# Altium PCB AICat V1.7 双面板 板厚1.6mm_lrd.PcbDoc (part 5 of 6)
Units mm, origin at the board's own origin, x right, y up, seen from the top; angles counter-clockwise.
Board outline 63.83 x 43.59 mm, 2 copper layers (Top Layer, Bottom Layer); 123 components, 84 nets, 332 pads, 255 vias.
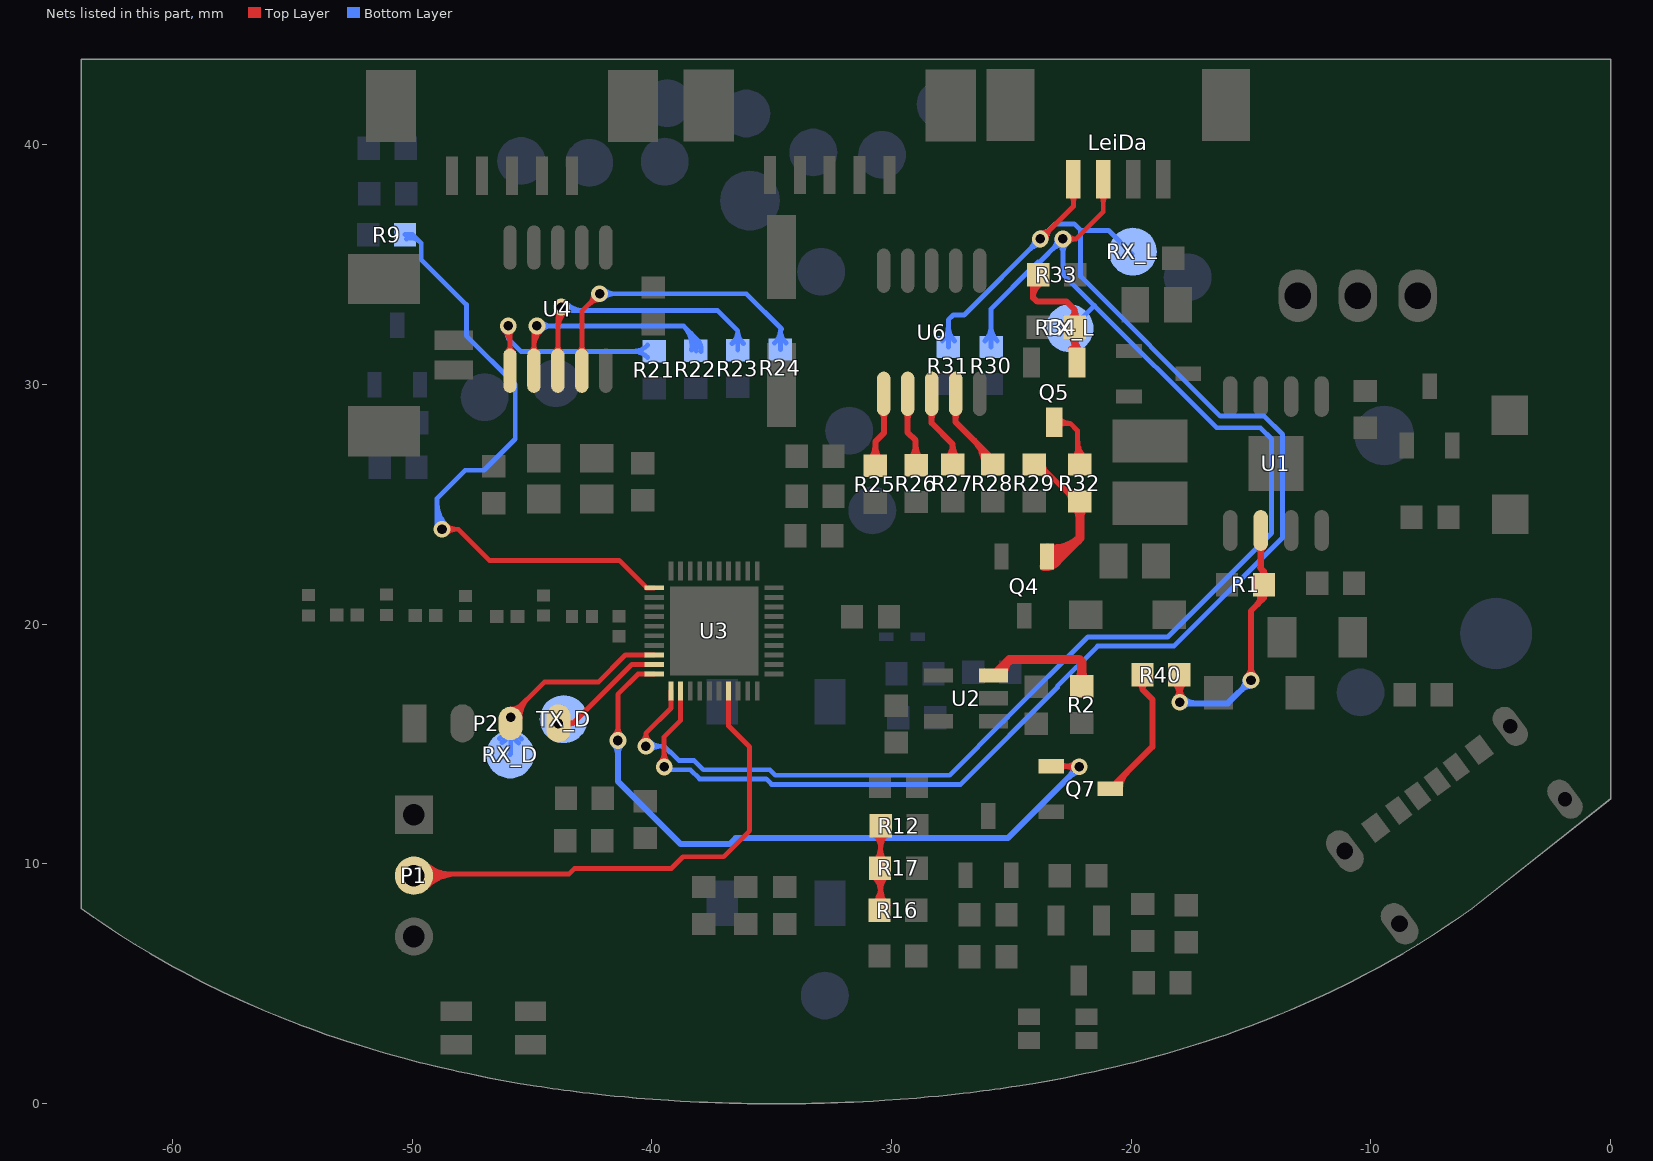
[diagram p5: the nets of this part, all layers, seen from the top]

## Via types
v1: diameter 0.7, hole 0.4, Top Layer to Bottom Layer, tented both sides, 255 vias

## Nets (pads, with @x,y where several pads share a name; then routed paths per layer and width w, separated by ;. In a path a pad name is that pad's centre, name@x,y a point inside that pad or via, vN(x,y) a via of type N, cw(c..) or ccw(c..) an arc to the next point about the centre after c; other vN are vias at no path point) (continued)
NetQ4_1: Q4.1 R29.2 R32.1 | length 46.1
  Top Layer w0.203: R29.2@-24.199,26.684 -23.859,26.684 R32.1@-22.294,25.118 ; R29.2@-24.022,26.295 cw(c-24.022,24.965) -23.081,25.905 ; R29.2@-24.022,26.295 cw(c-24.022,24.965) -23.081,25.905 ; R29.2@-24.022,26.295 cw(c-24.022,24.965) -23.081,25.905 ; R29.2@-24.022,26.295 cw(c-24.022,24.965) -23.081,25.905 ; R29.2@-24.022,26.295 cw(c-24.022,24.965) -23.081,25.905 ; R29.2@-24.022,26.498 cw(c-24.022,25.658) -23.428,26.252 ; R29.2@-24.022,26.498 cw(c-24.022,25.658) -23.428,26.252 ; R29.2@-24.022,26.498 cw(c-24.022,25.658) -23.428,26.252 ; R29.2@-24.022,26.498 cw(c-24.022,25.658) -23.428,26.252 ; R29.2@-24.022,26.498 cw(c-24.022,25.658) -23.428,26.252 ; R29.2@-23.658,26.658 ccw(c-23.234,26.658) -23.534,26.358 ; R29.2@-23.658,26.658 ccw(c-23.234,26.658) -23.534,26.358 ; R29.2@-23.658,26.658 ccw(c-23.234,26.658) -23.534,26.358 ; R29.2@-23.658,26.658 ccw(c-23.234,26.658) -23.534,26.358 ; R29.2@-23.658,26.658 ccw(c-23.234,26.658) -23.534,26.358 ; -23.004,25.829 ccw(c-22.167,26.666) R32.1@-22.167,25.482 ; -23.004,25.829 ccw(c-22.167,26.666) R32.1@-22.167,25.482 ; -23.004,25.829 ccw(c-22.167,26.666) R32.1@-22.167,25.482 ; -23.004,25.829 ccw(c-22.167,26.666) R32.1@-22.167,25.482 ; -23.004,25.829 ccw(c-22.167,26.666) R32.1@-22.167,25.482 ; -22.697,25.521 cw(c-23.1,25.118) R32.1@-22.53,25.118 ; -22.697,25.521 cw(c-23.1,25.118) R32.1@-22.53,25.118 ; -22.697,25.521 cw(c-23.1,25.118) R32.1@-22.53,25.118 ; -22.697,25.521 cw(c-23.1,25.118) R32.1@-22.53,25.118 ; -22.697,25.521 cw(c-23.1,25.118) R32.1@-22.53,25.118 ; -22.658,25.482 ccw(c-22.167,25.973) R32.1@-22.167,25.278 ; -22.658,25.482 ccw(c-22.167,25.973) R32.1@-22.167,25.278 ; -22.658,25.482 ccw(c-22.167,25.973) R32.1@-22.167,25.278 ; -22.658,25.482 ccw(c-22.167,25.973) R32.1@-22.167,25.278 ; -22.658,25.482 ccw(c-22.167,25.973) R32.1@-22.167,25.278
  Top Layer w0.381: Q4.1@-23.515,22.583 ccw(c-23.515,23.476) -22.884,22.844 ; Q4.1@-23.515,22.619 -23.109,22.619 -22.142,23.587 ; Q4.1@-23.515,22.964 ccw(c-23.515,24.777) -22.233,23.495 ; R32.1@-22.142,25.118 -22.142,23.587 ; Q4.1@-23.633,22.416 ccw(c-23.538,22.932) -23.167,22.561 ; Q4.1@-23.633,22.416 ccw(c-23.538,22.932) -23.167,22.561 ; Q4.1@-23.633,22.416 ccw(c-23.538,22.932) -23.167,22.561 ; Q4.1@-23.633,22.416 ccw(c-23.538,22.932) -23.167,22.561 ; Q4.1@-23.564,22.791 ccw(c-23.379,23.798) -22.654,23.074 ; Q4.1@-23.564,22.791 ccw(c-23.379,23.798) -22.654,23.074 ; Q4.1@-23.564,22.791 ccw(c-23.379,23.798) -22.654,23.074 ; Q4.1@-23.564,22.791 ccw(c-23.379,23.798) -22.654,23.074 ; Q4.1@-23.495,23.165 ccw(c-23.219,24.664) -22.142,23.587 ; Q4.1@-23.495,23.165 ccw(c-23.219,24.664) -22.142,23.587 ; Q4.1@-23.495,23.165 ccw(c-23.219,24.664) -22.142,23.587 ; Q4.1@-23.495,23.165 ccw(c-23.219,24.664) -22.142,23.587 ; Q4.1@-23.438,22.51 cw(c-23.174,22.246) -23.174,22.619 ; Q4.1@-23.438,22.51 cw(c-23.174,22.246) -23.174,22.619 ; Q4.1@-23.438,22.51 cw(c-23.174,22.246) -23.174,22.619 ; Q4.1@-23.438,22.51 cw(c-23.174,22.246) -23.174,22.619 ; R32.1@-22.336,24.924 cw(c-22.804,24.455) -22.142,24.455 ; R32.1@-22.336,24.924 cw(c-22.804,24.455) -22.142,24.455 ; R32.1@-22.336,24.924 cw(c-22.804,24.455) -22.142,24.455 ; R32.1@-22.336,24.924 cw(c-22.804,24.455) -22.142,24.455 ; R32.1@-22.336,24.924 cw(c-22.804,24.455) -22.142,24.455 ; -22.142,24.455 cw(c-21.479,24.455) R32.1@-21.948,24.924 ; -22.142,24.455 cw(c-21.479,24.455) R32.1@-21.948,24.924 ; -22.142,24.455 cw(c-21.479,24.455) R32.1@-21.948,24.924 ; -22.142,24.455 cw(c-21.479,24.455) R32.1@-21.948,24.924 ; -22.142,24.455 cw(c-21.479,24.455) R32.1@-21.948,24.924
NetQ5_1: Q5.1 R33.1 R34.2 | length 25.1
  Top Layer w0.203: R33.1@-24.232,34.575 R33.1@-24.232,34.778 ; Q5.1@-22.54,31.509 Q5.1@-22.309,31.278
  Top Layer w0.254: R33.1@-24.105,34.575 -24.105,33.643 -23.92,33.457 -22.7,33.457 -22.362,33.119 ; Q5.1@-22.362,30.923 -22.362,33.119 ; -24.105,33.734 cw(c-23.289,33.734) R33.1@-23.866,34.311 ; -24.105,33.734 cw(c-23.289,33.734) R33.1@-23.866,34.311 ; -24.105,33.734 cw(c-23.289,33.734) R33.1@-23.866,34.311 ; R34.2@-22.601,32.127 cw(c-23.178,31.55) -22.362,31.55 ; R34.2@-22.601,32.127 cw(c-23.178,31.55) -22.362,31.55 ; R34.2@-22.601,32.127 cw(c-23.178,31.55) -22.362,31.55 ; R34.2@-22.601,32.127 cw(c-23.178,31.55) -22.362,31.55 ; R34.2@-22.601,32.127 cw(c-23.178,31.55) -22.362,31.55 ; R34.2@-22.573,32.679 ccw(c-22.925,33.119) -22.362,33.119 ; R34.2@-22.573,32.679 ccw(c-22.925,33.119) -22.362,33.119 ; R34.2@-22.573,32.679 ccw(c-22.925,33.119) -22.362,33.119 ; R34.2@-22.573,32.679 ccw(c-22.925,33.119) -22.362,33.119 ; R34.2@-22.573,32.679 ccw(c-22.925,33.119) -22.362,33.119 ; -22.362,31.55 cw(c-21.546,31.55) R34.2@-22.123,32.127 ; -22.362,31.55 cw(c-21.546,31.55) R34.2@-22.123,32.127 ; -22.362,31.55 cw(c-21.546,31.55) R34.2@-22.123,32.127 ; -22.362,31.55 cw(c-21.546,31.55) R34.2@-22.123,32.127 ; -22.362,31.55 cw(c-21.546,31.55) R34.2@-22.123,32.127 ; R34.2@-22.362,31.987 ccw(c-21.47,31.987) Q5.1@-22.101,31.355 ; R34.2@-22.362,31.987 ccw(c-21.47,31.987) Q5.1@-22.101,31.355 ; R34.2@-22.362,31.987 ccw(c-21.47,31.987) Q5.1@-22.101,31.355 ; R34.2@-22.362,31.987 ccw(c-21.47,31.987) Q5.1@-22.101,31.355 ; R34.2@-22.362,31.987 ccw(c-21.47,31.987) Q5.1@-22.101,31.355 ; -22.362,33.119 ccw(c-21.799,33.119) R34.2@-22.151,32.679 ; -22.362,33.119 ccw(c-21.799,33.119) R34.2@-22.151,32.679 ; -22.362,33.119 ccw(c-21.799,33.119) R34.2@-22.151,32.679 ; -22.362,33.119 ccw(c-21.799,33.119) R34.2@-22.151,32.679 ; -22.362,33.119 ccw(c-21.799,33.119) R34.2@-22.151,32.679 ; -24.105,33.615 cw(c-23.388,33.615) -23.72,34.25 ccw(c-23.388,33.615) -24.105,33.615 ; -24.105,34.034 cw(c-23.607,34.034) -23.838,34.476 ccw(c-23.607,34.034) -24.105,34.034
NetQ5_3: Q5.3 R32.2 | length 15.7
  Top Layer w0.203: Q5.3@-23.437,28.377 -22.548,28.377 ; R32.2@-22.294,26.658 -22.243,26.709 -22.243,28.073 -22.548,28.377 ; Q5.3@-23.033,28.247 cw(c-22.718,27.933) -22.718,28.377 ; Q5.3@-23.033,28.247 cw(c-22.718,27.933) -22.718,28.377 ; Q5.3@-23.033,28.247 cw(c-22.718,27.933) -22.718,28.377 ; Q5.3@-23.033,28.247 cw(c-22.718,27.933) -22.718,28.377 ; Q5.3@-23.024,28.589 ccw(c-22.548,29.018) -22.548,28.377 ; Q5.3@-23.024,28.589 ccw(c-22.548,29.018) -22.548,28.377 ; Q5.3@-23.024,28.589 ccw(c-22.548,29.018) -22.548,28.377 ; Q5.3@-23.024,28.589 ccw(c-22.548,29.018) -22.548,28.377 ; R32.2@-22.424,26.915 ccw(c-22.859,27.351) -22.243,27.351 ; R32.2@-22.424,26.915 ccw(c-22.859,27.351) -22.243,27.351 ; R32.2@-22.424,26.915 ccw(c-22.859,27.351) -22.243,27.351 ; R32.2@-22.424,26.915 ccw(c-22.859,27.351) -22.243,27.351 ; R32.2@-22.424,26.915 ccw(c-22.859,27.351) -22.243,27.351 ; -22.243,27.23 ccw(c-21.595,27.23) R32.2@-22.053,26.771 ; -22.243,27.23 ccw(c-21.595,27.23) R32.2@-22.053,26.771 ; -22.243,27.23 ccw(c-21.595,27.23) R32.2@-22.053,26.771 ; -22.243,27.23 ccw(c-21.595,27.23) R32.2@-22.053,26.771 ; -22.243,27.23 ccw(c-21.595,27.23) R32.2@-22.053,26.771 ; -22.243,27.72 ccw(c-21.104,27.72) R32.2@-21.91,26.915 ; -22.243,27.72 ccw(c-21.104,27.72) R32.2@-21.91,26.915 ; -22.243,27.72 ccw(c-21.104,27.72) R32.2@-21.91,26.915 ; -22.243,27.72 ccw(c-21.104,27.72) R32.2@-21.91,26.915 ; -22.243,27.72 ccw(c-21.104,27.72) R32.2@-21.91,26.915
NetQ7_3: Q7.3 R40.1 | length 12.2
  Top Layer w0.254: Q7.3@-20.873,13.125 -19.119,14.879 -19.119,16.863 -19.533,17.278 ; R40.1@-19.533,17.887 -19.533,17.278 ; Q7.3@-20.465,13.125 cw(c-19.48,13.125) -20.177,13.822 ; Q7.3@-20.465,13.125 cw(c-19.48,13.125) -20.177,13.822 ; Q7.3@-20.465,13.125 cw(c-19.48,13.125) -20.177,13.822 ; R40.1@-19.702,17.569 cw(c-19.87,17.278) -19.533,17.278 ; R40.1@-19.702,17.569 cw(c-19.87,17.278) -19.533,17.278 ; R40.1@-19.702,17.569 cw(c-19.87,17.278) -19.533,17.278 ; R40.1@-19.702,17.569 cw(c-19.87,17.278) -19.533,17.278 ; R40.1@-19.702,17.569 cw(c-19.87,17.278) -19.533,17.278 ; R40.1@-19.702,17.569 cw(c-19.87,17.278) -19.533,17.278 ; -19.533,17.278 cw(c-19.197,17.278) R40.1@-19.365,17.569 ; -19.533,17.278 cw(c-19.197,17.278) R40.1@-19.365,17.569 ; -19.533,17.278 cw(c-19.197,17.278) R40.1@-19.365,17.569 ; -19.533,17.278 cw(c-19.197,17.278) R40.1@-19.365,17.569 ; -19.533,17.278 cw(c-19.197,17.278) R40.1@-19.365,17.569 ; -19.533,17.278 cw(c-19.197,17.278) R40.1@-19.365,17.569
NetR1_2: R1.2 R40.2 U1.2 | length 41.6
  Top Layer w0.254: R40.2@-18.263,17.616 -17.976,17.328 ; v1(-17.976,16.744) -17.976,17.328 ; v1(-15.004,17.659) -15.004,20.554 -14.463,21.096 ; U1.2@-14.598,24.491 U1.2@-14.598,23.907 -14.598,22.332 -14.471,22.205 ; R1.2@-14.463,21.646 -14.463,21.096 ; R40.2@-18.232,17.623 cw(c-18.851,17.004) v1@-17.976,17.004 ; R40.2@-18.232,17.623 cw(c-18.851,17.004) v1@-17.976,17.004 ; R40.2@-18.232,17.623 cw(c-18.851,17.004) v1@-17.976,17.004 ; v1@-18.134,16.902 ccw(c-18.514,17.283) -17.976,17.283 ; v1@-18.134,16.902 ccw(c-18.514,17.283) -17.976,17.283 ; v1@-18.134,16.902 ccw(c-18.514,17.283) -17.976,17.283 ; R40.2@-18.124,17.55 cw(c-18.217,17.328) -17.976,17.328 ; R40.2@-18.124,17.55 cw(c-18.217,17.328) -17.976,17.328 ; R40.2@-18.124,17.55 cw(c-18.217,17.328) -17.976,17.328 ; v1@-17.976,17.088 cw(c-17.219,17.088) R40.2@-17.754,17.623 ; v1@-17.976,17.088 cw(c-17.219,17.088) R40.2@-17.754,17.623 ; v1@-17.976,17.088 cw(c-17.219,17.088) R40.2@-17.754,17.623 ; -17.976,17.283 ccw(c-17.438,17.283) v1@-17.818,16.902 ; -17.976,17.283 ccw(c-17.438,17.283) v1@-17.818,16.902 ; -17.976,17.283 ccw(c-17.438,17.283) v1@-17.818,16.902 ; -17.976,17.328 cw(c-17.709,17.328) R40.2@-17.834,17.564 ; -17.976,17.328 cw(c-17.709,17.328) R40.2@-17.834,17.564 ; -17.976,17.328 cw(c-17.709,17.328) R40.2@-17.834,17.564 ; v1@-15.162,17.816 ccw(c-15.543,18.197) -15.004,18.197 ; v1@-15.162,17.816 ccw(c-15.543,18.197) -15.004,18.197 ; v1@-15.162,17.816 ccw(c-15.543,18.197) -15.004,18.197 ; -15.004,18.197 ccw(c-14.466,18.197) v1@-14.847,17.816 ; -15.004,18.197 ccw(c-14.466,18.197) v1@-14.847,17.816 ; -15.004,18.197 ccw(c-14.466,18.197) v1@-14.847,17.816 ; -14.741,20.817 ccw(c-15.045,21.121) R1.2@-14.719,21.401 ; -14.741,20.817 ccw(c-15.045,21.121) R1.2@-14.719,21.401 ; -14.741,20.817 ccw(c-15.045,21.121) R1.2@-14.719,21.401 ; U1.2@-14.724,23.236 cw(c-15.027,22.933) -14.598,22.933 ; U1.2@-14.724,23.236 cw(c-15.027,22.933) -14.598,22.933 ; U1.2@-14.724,23.236 cw(c-15.027,22.933) -14.598,22.933 ; U1.2@-14.724,23.236 cw(c-15.027,22.933) -14.598,22.933 ; U1.2@-14.724,23.236 cw(c-15.027,22.933) -14.598,22.933 ; -14.624,22.359 cw(c-15.005,21.978) R1.2@-14.536,21.713 ; -14.624,22.359 cw(c-15.005,21.978) R1.2@-14.536,21.713 ; -14.624,22.359 cw(c-15.005,21.978) R1.2@-14.536,21.713 ; -14.624,22.359 cw(c-15.005,21.978) R1.2@-14.536,21.713 ; -14.624,22.359 cw(c-15.005,21.978) R1.2@-14.536,21.713 ; R1.2@-14.603,21.314 cw(c-14.703,21.096) -14.463,21.096 ; R1.2@-14.603,21.314 cw(c-14.703,21.096) -14.463,21.096 ; R1.2@-14.603,21.314 cw(c-14.703,21.096) -14.463,21.096 ; -14.598,22.933 cw(c-14.169,22.933) U1.2@-14.472,23.236 ; -14.598,22.933 cw(c-14.169,22.933) U1.2@-14.472,23.236 ; -14.598,22.933 cw(c-14.169,22.933) U1.2@-14.472,23.236 ; -14.598,22.933 cw(c-14.169,22.933) U1.2@-14.472,23.236 ; -14.598,22.933 cw(c-14.169,22.933) U1.2@-14.472,23.236 ; -14.548,21.011 ccw(c-14.837,21.3) R1.2@-14.527,21.567 ; -14.548,21.011 ccw(c-14.837,21.3) R1.2@-14.527,21.567 ; -14.548,21.011 ccw(c-14.837,21.3) R1.2@-14.527,21.567 ; -14.543,22.277 cw(c-14.827,21.993) R1.2@-14.526,21.727 ; -14.543,22.277 cw(c-14.827,21.993) R1.2@-14.526,21.727 ; -14.543,22.277 cw(c-14.827,21.993) R1.2@-14.526,21.727 ; -14.543,22.277 cw(c-14.827,21.993) R1.2@-14.526,21.727 ; -14.543,22.277 cw(c-14.827,21.993) R1.2@-14.526,21.727 ; -14.463,21.096 cw(c-14.223,21.096) R1.2@-14.322,21.314 ; -14.463,21.096 cw(c-14.223,21.096) R1.2@-14.322,21.314 ; -14.463,21.096 cw(c-14.223,21.096) R1.2@-14.322,21.314
  Bottom Layer w0.254: v1@-17.671,16.693 -15.969,16.693 v1(-15.004,17.659) ; v1@-17.818,16.586 cw(c-17.56,16.328) -17.56,16.693 ; v1@-17.818,16.586 cw(c-17.56,16.328) -17.56,16.693 ; v1@-17.818,16.586 cw(c-17.56,16.328) -17.56,16.693 ; v1@-17.818,16.902 ccw(c-17.315,17.405) -17.315,16.693 ; v1@-17.818,16.902 ccw(c-17.315,17.405) -17.315,16.693 ; v1@-17.818,16.902 ccw(c-17.315,17.405) -17.315,16.693 ; -15.385,17.278 cw(c-15.004,16.897) v1@-15.004,17.436 ; -15.385,17.278 ccw(c-15.766,17.659) v1@-15.227,17.659 ; -15.385,17.278 ccw(c-15.766,17.659) v1@-15.227,17.659 ; -15.385,17.278 cw(c-15.004,16.897) v1@-15.004,17.436 ; -15.385,17.278 ccw(c-15.766,17.659) v1@-15.227,17.659 ; -15.385,17.278 cw(c-15.004,16.897) v1@-15.004,17.436
NetR2_2: R2.2 U2.3 | length 13.9
  Top Layer w0.381: U2.3@-25.744,17.855 -25.077,18.522 ; R2.2@-22.065,17.413 -22.065,18.421 -22.167,18.522 -25.077,18.522 ; U2.3@-25.335,17.86 cw(c-24.452,17.898) -25.077,18.522 ; U2.3@-25.335,17.86 cw(c-24.452,17.898) -25.077,18.522 ; U2.3@-25.335,17.86 cw(c-24.452,17.898) -25.077,18.522 ; U2.3@-25.335,17.86 cw(c-24.452,17.898) -25.077,18.522 ; U2.3@-25.335,17.86 cw(c-24.452,17.898) -25.077,18.522 ; R2.2@-22.26,17.607 ccw(c-22.728,18.075) -22.065,18.075 ; R2.2@-22.26,17.607 ccw(c-22.728,18.075) -22.065,18.075 ; R2.2@-22.26,17.607 ccw(c-22.728,18.075) -22.065,18.075 ; R2.2@-22.26,17.607 ccw(c-22.728,18.075) -22.065,18.075 ; R2.2@-22.26,17.607 ccw(c-22.728,18.075) -22.065,18.075 ; -22.065,18.075 ccw(c-21.403,18.075) R2.2@-21.871,17.607 ; -22.065,18.075 ccw(c-21.403,18.075) R2.2@-21.871,17.607 ; -22.065,18.075 ccw(c-21.403,18.075) R2.2@-21.871,17.607 ; -22.065,18.075 ccw(c-21.403,18.075) R2.2@-21.871,17.607 ; -22.065,18.075 ccw(c-21.403,18.075) R2.2@-21.871,17.607
NetR12_2: R12.2 R16.2 R17.1 | length 33.3
  Top Layer w0.203: R16.2@-30.662,8.263 ccw(c-31.159,8.761) -30.455,8.761 ; R12.2@-30.455,11.512 -30.455,8.032 R16.2@-30.405,7.981 ; R16.2@-30.291,8.119 cw(c-29.895,8.516) R16.2@-30.455,8.516 ; R16.2@-30.148,8.263 cw(c-29.405,9.006) -30.455,9.006 ; R17.1@-30.738,9.452 cw(c-31.419,8.77) -30.455,8.77 ; R17.1@-30.738,9.452 cw(c-31.419,8.77) -30.455,8.77 ; R17.1@-30.738,9.452 cw(c-31.419,8.77) -30.455,8.77 ; R17.1@-30.738,10.016 ccw(c-31.419,10.697) -30.455,10.697 ; R17.1@-30.738,10.016 ccw(c-31.419,10.697) -30.455,10.697 ; R17.1@-30.738,10.016 ccw(c-31.419,10.697) -30.455,10.697 ; R12.2@-30.712,11.23 cw(c-31.333,10.609) -30.455,10.609 ; R12.2@-30.712,11.23 cw(c-31.333,10.609) -30.455,10.609 ; R12.2@-30.712,11.23 cw(c-31.333,10.609) -30.455,10.609 ; R16.2@-30.455,8.516 cw(c-31.016,8.516) -30.62,8.119 ccw(c-31.016,8.516) R16.2@-30.455,8.516 ; -30.455,8.761 ccw(c-29.752,8.761) -30.249,8.263 cw(c-29.752,8.761) -30.455,8.761 ; -30.455,8.893 cw(c-29.665,8.893) R17.1@-30.224,9.452 ; -30.455,8.893 cw(c-29.665,8.893) R17.1@-30.224,9.452 ; -30.455,8.893 cw(c-29.665,8.893) R17.1@-30.224,9.452 ; -30.455,9.006 cw(c-31.506,9.006) -30.763,8.263 ccw(c-31.506,9.006) -30.455,9.006 ; -30.455,10.575 ccw(c-29.665,10.575) R17.1@-30.224,10.016 ; -30.455,10.575 ccw(c-29.665,10.575) R17.1@-30.224,10.016 ; -30.455,10.575 ccw(c-29.665,10.575) R17.1@-30.224,10.016 ; -30.455,10.609 cw(c-29.578,10.609) R12.2@-30.198,11.23 ; -30.455,10.609 cw(c-29.578,10.609) R12.2@-30.198,11.23 ; -30.455,10.609 cw(c-29.578,10.609) R12.2@-30.198,11.23 ; -30.455,10.66 ccw(c-31.333,10.66) -30.712,11.281 cw(c-31.333,10.66) -30.455,10.66 ; -30.455,10.66 cw(c-29.578,10.66) -30.198,11.281 ccw(c-29.578,10.66) -30.455,10.66 ; R16.2@-30.763,8.314 ccw(c-31.506,9.057) -30.455,9.057 cw(c-31.506,9.057) R16.2@-30.763,8.314 ; R17.1@-30.738,9.503 cw(c-31.419,8.821) -30.455,8.821 ccw(c-31.419,8.821) R17.1@-30.738,9.503 ; R17.1@-30.738,10.067 ccw(c-31.419,10.748) -30.455,10.748 cw(c-31.419,10.748) R17.1@-30.738,10.067 ; R16.2@-30.62,8.17 ccw(c-31.016,8.566) -30.455,8.566 cw(c-31.016,8.566) R16.2@-30.62,8.17 ; -30.455,8.812 ccw(c-29.752,8.812) -30.249,8.314 cw(c-29.752,8.812) -30.455,8.812 ; -30.455,8.943 cw(c-29.665,8.943) -30.224,9.503 ccw(c-29.665,8.943) -30.455,8.943 ; -30.455,10.626 ccw(c-29.665,10.626) -30.224,10.067 cw(c-29.665,10.626) -30.455,10.626
NetR21_1: R21.1 U4.1 | length 26.1
  Top Layer w0.203: v1(-45.992,32.441) -45.923,32.372 U4.1@-45.923,30.575 ; v1@-46.168,32.266 cw(c-46.758,31.675) -45.923,31.675 ; v1@-46.168,32.266 cw(c-46.758,31.675) -45.923,31.675 ; v1@-46.168,32.266 cw(c-46.758,31.675) -45.923,31.675 ; v1@-46.168,32.266 cw(c-46.758,31.675) -45.923,31.675 ; v1@-46.168,32.266 cw(c-46.758,31.675) -45.923,31.675 ; U4.1@-46.049,31.349 ccw(c-46.354,31.653) -45.923,31.653 ; U4.1@-46.049,31.349 ccw(c-46.354,31.653) -45.923,31.653 ; U4.1@-46.049,31.349 ccw(c-46.354,31.653) -45.923,31.653 ; U4.1@-46.049,31.349 ccw(c-46.354,31.653) -45.923,31.653 ; U4.1@-46.049,31.349 ccw(c-46.354,31.653) -45.923,31.653 ; -45.923,31.653 ccw(c-45.493,31.653) U4.1@-45.797,31.349 ; -45.923,31.653 ccw(c-45.493,31.653) U4.1@-45.797,31.349 ; -45.923,31.653 ccw(c-45.493,31.653) U4.1@-45.797,31.349 ; -45.923,31.653 ccw(c-45.493,31.653) U4.1@-45.797,31.349 ; -45.923,31.653 ccw(c-45.493,31.653) U4.1@-45.797,31.349 ; -45.923,32.008 cw(c-45.559,32.008) v1@-45.817,32.266 ; -45.923,32.008 cw(c-45.559,32.008) v1@-45.817,32.266 ; -45.923,32.008 cw(c-45.559,32.008) v1@-45.817,32.266 ; -45.923,32.008 cw(c-45.559,32.008) v1@-45.817,32.266 ; -45.923,32.008 cw(c-45.559,32.008) v1@-45.817,32.266
  Bottom Layer w0.203: v1(-45.992,32.441) -45.992,31.908 ; -41.166,31.383 -41.522,31.383 ; -40.48,31.324 -40.539,31.383 -41.522,31.383 ; v1@-46.152,32.251 cw(c-46.441,31.908) -45.992,31.908 ; v1@-46.152,32.251 cw(c-46.441,31.908) -45.992,31.908 ; v1@-46.152,32.251 cw(c-46.441,31.908) -45.992,31.908 ; v1@-46.152,32.251 cw(c-46.441,31.908) -45.992,31.908 ; v1@-46.152,32.251 cw(c-46.441,31.908) -45.992,31.908 ; -45.992,31.908 cw(c-45.544,31.908) v1@-45.832,32.251 ; -45.992,31.908 cw(c-45.544,31.908) v1@-45.832,32.251 ; -45.992,31.908 cw(c-45.544,31.908) v1@-45.832,32.251 ; -45.992,31.908 cw(c-45.544,31.908) v1@-45.832,32.251 ; -45.992,31.908 cw(c-45.544,31.908) v1@-45.832,32.251 ; -45.992,31.908 -45.467,31.383 -41.522,31.383 ; -40.799,31.383 cw(c-40.799,30.505) R21.1@-40.178,31.126 ; -40.799,31.383 ccw(c-40.799,32.26) R21.1@-40.178,31.64 ; -40.799,31.383 cw(c-40.799,30.505) R21.1@-40.178,31.126 ; -40.799,31.383 ccw(c-40.799,32.26) R21.1@-40.178,31.64 ; -40.799,31.383 ccw(c-40.799,32.26) R21.1@-40.178,31.64 ; -40.799,31.383 cw(c-40.799,30.505) R21.1@-40.178,31.126 ; -40.799,31.383 ccw(c-40.799,32.26) R21.1@-40.178,31.64 ; -40.799,31.383 cw(c-40.799,30.505) R21.1@-40.178,31.126
NetR22_1: R22.1 U4.2 | length 35.9
  Top Layer w0.203: U4.2@-44.923,30.575 -44.923,32.317 v1(-44.798,32.441) ; U4.2@-45.049,31.349 ccw(c-45.354,31.653) -44.923,31.653 ; U4.2@-45.049,31.349 ccw(c-45.354,31.653) -44.923,31.653 ; U4.2@-45.049,31.349 ccw(c-45.354,31.653) -44.923,31.653 ; U4.2@-45.049,31.349 ccw(c-45.354,31.653) -44.923,31.653 ; U4.2@-45.049,31.349 ccw(c-45.354,31.653) -44.923,31.653 ; -44.923,31.54 cw(c-43.897,31.54) v1@-44.623,32.266 ; -44.923,31.54 cw(c-43.897,31.54) v1@-44.623,32.266 ; -44.923,31.54 cw(c-43.897,31.54) v1@-44.623,32.266 ; -44.923,31.54 cw(c-43.897,31.54) v1@-44.623,32.266 ; -44.923,31.54 cw(c-43.897,31.54) v1@-44.623,32.266 ; -44.923,31.653 ccw(c-44.493,31.653) U4.2@-44.797,31.349 ; -44.923,31.653 ccw(c-44.493,31.653) U4.2@-44.797,31.349 ; -44.923,31.653 ccw(c-44.493,31.653) U4.2@-44.797,31.349 ; -44.923,31.653 ccw(c-44.493,31.653) U4.2@-44.797,31.349 ; -44.923,31.653 ccw(c-44.493,31.653) U4.2@-44.797,31.349 ; -44.923,32.031 cw(c-44.388,32.031) v1@-44.766,32.409 ; -44.923,32.031 cw(c-44.388,32.031) v1@-44.766,32.409 ; -44.923,32.031 cw(c-44.388,32.031) v1@-44.766,32.409 ; -44.923,32.031 cw(c-44.388,32.031) v1@-44.766,32.409 ; -44.923,32.031 cw(c-44.388,32.031) v1@-44.766,32.409
  Bottom Layer w0.203: v1(-44.798,32.441) -38.677,32.441 -38.673,32.438 ; -38.67,32.435 cw(c-39.478,31.627) R22.1@-38.352,31.435 ; -38.392,32.157 cw(c-39.003,31.546) R22.1@-38.152,31.401 ; R22.1@-38.169,31.408 -38.169,31.933 -38.673,32.438 ; -38.114,31.879 cw(c-38.528,31.465) R22.1@-37.951,31.367 ; v1@-44.623,32.266 cw(c-44.199,31.842) -44.199,32.441 ; v1@-44.623,32.266 cw(c-44.199,31.842) -44.199,32.441 ; v1@-44.623,32.266 cw(c-44.199,31.842) -44.199,32.441 ; v1@-44.623,32.266 cw(c-44.199,31.842) -44.199,32.441 ; v1@-44.623,32.266 cw(c-44.199,31.842) -44.199,32.441 ; v1@-44.623,32.617 ccw(c-44.199,33.041) -44.199,32.441 ; v1@-44.623,32.617 ccw(c-44.199,33.041) -44.199,32.441 ; v1@-44.623,32.617 ccw(c-44.199,33.041) -44.199,32.441 ; v1@-44.623,32.617 ccw(c-44.199,33.041) -44.199,32.441 ; v1@-44.623,32.617 ccw(c-44.199,33.041) -44.199,32.441 ; -38.673,32.438 cw(c-39.487,31.624) R22.1@-38.352,31.434 ; -38.673,32.438 cw(c-39.487,31.624) R22.1@-38.352,31.434 ; -38.673,32.438 cw(c-39.487,31.624) R22.1@-38.352,31.434 ; -38.673,32.438 cw(c-39.487,31.624) R22.1@-38.352,31.434 ; -38.394,32.159 cw(c-39.008,31.544) R22.1@-38.152,31.401 ; -38.394,32.159 cw(c-39.008,31.544) R22.1@-38.152,31.401 ; -38.394,32.159 cw(c-39.008,31.544) R22.1@-38.152,31.401 ; -38.394,32.159 cw(c-39.008,31.544) R22.1@-38.152,31.401 ; -38.115,31.88 cw(c-38.53,31.464) R22.1@-37.951,31.367 ; -38.115,31.88 cw(c-38.53,31.464) R22.1@-37.951,31.367 ; -38.115,31.88 cw(c-38.53,31.464) R22.1@-37.951,31.367 ; -38.115,31.88 cw(c-38.53,31.464) R22.1@-37.951,31.367
NetR23_1: R23.1 U4.3 | length 33.9
  Top Layer w0.203: U4.3@-43.923,30.575 -43.923,33.088 v1(-43.782,33.229) ; U4.3@-44.049,31.349 ccw(c-44.354,31.653) -43.923,31.653 ; U4.3@-44.049,31.349 ccw(c-44.354,31.653) -43.923,31.653 ; U4.3@-44.049,31.349 ccw(c-44.354,31.653) -43.923,31.653 ; U4.3@-44.049,31.349 ccw(c-44.354,31.653) -43.923,31.653 ; U4.3@-44.049,31.349 ccw(c-44.354,31.653) -43.923,31.653 ; -43.923,31.653 ccw(c-43.493,31.653) U4.3@-43.797,31.349 ; -43.923,31.653 ccw(c-43.493,31.653) U4.3@-43.797,31.349 ; -43.923,31.653 ccw(c-43.493,31.653) U4.3@-43.797,31.349 ; -43.923,31.653 ccw(c-43.493,31.653) U4.3@-43.797,31.349 ; -43.923,31.653 ccw(c-43.493,31.653) U4.3@-43.797,31.349 ; -43.923,32.289 cw(c-42.843,32.289) v1@-43.607,33.053 ; -43.923,32.289 cw(c-42.843,32.289) v1@-43.607,33.053 ; -43.923,32.289 cw(c-42.843,32.289) v1@-43.607,33.053 ; -43.923,32.289 cw(c-42.843,32.289) v1@-43.607,33.053 ; -43.923,32.289 cw(c-42.843,32.289) v1@-43.607,33.053 ; -43.923,32.78 cw(c-43.333,32.78) v1@-43.75,33.197 ; -43.923,32.78 cw(c-43.333,32.78) v1@-43.75,33.197 ; -43.923,32.78 cw(c-43.333,32.78) v1@-43.75,33.197 ; -43.923,32.78 cw(c-43.333,32.78) v1@-43.75,33.197 ; -43.923,32.78 cw(c-43.333,32.78) v1@-43.75,33.197
  Bottom Layer w0.203: v1@-43.737,33.082 -38.53,33.082 -37.26,33.082 -36.416,32.238 ; R23.1@-36.416,31.433 -36.416,32.238 ; v1@-43.75,33.261 ccw(c-43.319,33.692) -43.319,33.082 ; v1@-43.75,33.261 ccw(c-43.319,33.692) -43.319,33.082 ; v1@-43.75,33.261 ccw(c-43.319,33.692) -43.319,33.082 ; v1@-43.75,33.261 ccw(c-43.319,33.692) -43.319,33.082 ; v1@-43.75,33.261 ccw(c-43.319,33.692) -43.319,33.082 ; v1@-43.607,33.404 ccw(c-42.828,34.183) -42.828,33.082 ; v1@-43.607,33.404 ccw(c-42.828,34.183) -42.828,33.082 ; v1@-43.607,33.404 ccw(c-42.828,34.183) -42.828,33.082 ; v1@-43.607,33.404 ccw(c-42.828,34.183) -42.828,33.082 ; v1@-43.607,33.404 ccw(c-42.828,34.183) -42.828,33.082 ; R23.1@-36.657,31.706 ccw(c-37.126,32.238) -36.416,32.238 ; R23.1@-36.657,31.706 ccw(c-37.126,32.238) -36.416,32.238 ; R23.1@-36.657,31.706 ccw(c-37.126,32.238) -36.416,32.238 ; R23.1@-36.657,31.706 ccw(c-37.126,32.238) -36.416,32.238 ; R23.1@-36.657,31.706 ccw(c-37.126,32.238) -36.416,32.238 ; -36.416,32.238 ccw(c-35.707,32.238) R23.1@-36.176,31.706 ; -36.416,32.238 ccw(c-35.707,32.238) R23.1@-36.176,31.706 ; -36.416,32.238 ccw(c-35.707,32.238) R23.1@-36.176,31.706 ; -36.416,32.238 ccw(c-35.707,32.238) R23.1@-36.176,31.706 ; -36.416,32.238 ccw(c-35.707,32.238) R23.1@-36.176,31.706
NetR24_1: R24.1 U4.4 | length 31.4
  Top Layer w0.203: U4.4@-42.923,30.575 -42.923,33.047 v1(-42.182,33.788) ; U4.4@-43.049,31.349 ccw(c-43.354,31.653) -42.923,31.653 ; U4.4@-43.049,31.349 ccw(c-43.354,31.653) -42.923,31.653 ; U4.4@-43.049,31.349 ccw(c-43.354,31.653) -42.923,31.653 ; U4.4@-43.049,31.349 ccw(c-43.354,31.653) -42.923,31.653 ; U4.4@-43.049,31.349 ccw(c-43.354,31.653) -42.923,31.653 ; -42.923,31.653 ccw(c-42.493,31.653) U4.4@-42.797,31.349 ; -42.923,31.653 ccw(c-42.493,31.653) U4.4@-42.797,31.349 ; -42.923,31.653 ccw(c-42.493,31.653) U4.4@-42.797,31.349 ; -42.923,31.653 ccw(c-42.493,31.653) U4.4@-42.797,31.349 ; -42.923,31.653 ccw(c-42.493,31.653) U4.4@-42.797,31.349 ; -42.606,33.364 cw(c-42.182,32.939) v1@-42.182,33.539 ; -42.606,33.364 ccw(c-43.03,33.788) v1@-42.431,33.788 ; -42.606,33.364 cw(c-42.182,32.939) v1@-42.182,33.539 ; -42.606,33.364 ccw(c-43.03,33.788) v1@-42.431,33.788 ; -42.606,33.364 ccw(c-43.03,33.788) v1@-42.431,33.788 ; -42.606,33.364 cw(c-42.182,32.939) v1@-42.182,33.539 ; -42.606,33.364 ccw(c-43.03,33.788) v1@-42.431,33.788 ; -42.606,33.364 cw(c-42.182,32.939) v1@-42.182,33.539 ; -42.606,33.364 ccw(c-43.03,33.788) v1@-42.431,33.788 ; -42.606,33.364 cw(c-42.182,32.939) v1@-42.182,33.539
  Bottom Layer w0.203: v1(-42.182,33.788) -36.061,33.788 -34.588,32.314 -34.638,32.264 ; R24.1@-34.638,31.459 -34.638,32.264 ; v1@-42.007,33.612 cw(c-41.583,33.188) -41.583,33.788 ; v1@-42.007,33.612 cw(c-41.583,33.188) -41.583,33.788 ; v1@-42.007,33.612 cw(c-41.583,33.188) -41.583,33.788 ; v1@-42.007,33.612 cw(c-41.583,33.188) -41.583,33.788 ; v1@-42.007,33.612 cw(c-41.583,33.188) -41.583,33.788 ; v1@-42.007,33.963 ccw(c-41.583,34.387) -41.583,33.788 ; v1@-42.007,33.963 ccw(c-41.583,34.387) -41.583,33.788 ; v1@-42.007,33.963 ccw(c-41.583,34.387) -41.583,33.788 ; v1@-42.007,33.963 ccw(c-41.583,34.387) -41.583,33.788 ; v1@-42.007,33.963 ccw(c-41.583,34.387) -41.583,33.788 ; R24.1@-34.879,31.731 ccw(c-35.348,32.264) -34.638,32.264 ; R24.1@-34.879,31.731 ccw(c-35.348,32.264) -34.638,32.264 ; R24.1@-34.879,31.731 ccw(c-35.348,32.264) -34.638,32.264 ; R24.1@-34.879,31.731 ccw(c-35.348,32.264) -34.638,32.264 ; R24.1@-34.879,31.731 ccw(c-35.348,32.264) -34.638,32.264 ; -34.638,32.264 ccw(c-33.929,32.264) R24.1@-34.398,31.731 ; -34.638,32.264 ccw(c-33.929,32.264) R24.1@-34.398,31.731 ; -34.638,32.264 ccw(c-33.929,32.264) R24.1@-34.398,31.731 ; -34.638,32.264 ccw(c-33.929,32.264) R24.1@-34.398,31.731 ; -34.638,32.264 ccw(c-33.929,32.264) R24.1@-34.398,31.731
NetR25_1: R25.1 U6.1 | length 12.5
  Top Layer w0.254: R25.1@-30.676,26.607 -30.676,27.615 -30.32,27.971 -30.32,29.602 U6.1@-30.328,29.61 ; R25.1@-30.915,26.846 ccw(c-31.492,27.423) -30.676,27.423 ; R25.1@-30.915,26.846 ccw(c-31.492,27.423) -30.676,27.423 ; R25.1@-30.915,26.846 ccw(c-31.492,27.423) -30.676,27.423 ; R25.1@-30.915,26.846 ccw(c-31.492,27.423) -30.676,27.423 ; R25.1@-30.915,26.846 ccw(c-31.492,27.423) -30.676,27.423 ; -30.676,27.423 ccw(c-29.86,27.423) R25.1@-30.437,26.846 ; -30.676,27.423 ccw(c-29.86,27.423) R25.1@-30.437,26.846 ; -30.676,27.423 ccw(c-29.86,27.423) R25.1@-30.437,26.846 ; -30.676,27.423 ccw(c-29.86,27.423) R25.1@-30.437,26.846 ; -30.676,27.423 ccw(c-29.86,27.423) R25.1@-30.437,26.846 ; U6.1@-30.436,28.854 cw(c-30.714,28.575) -30.32,28.575 ; U6.1@-30.436,28.854 cw(c-30.714,28.575) -30.32,28.575 ; U6.1@-30.436,28.854 cw(c-30.714,28.575) -30.32,28.575 ; U6.1@-30.436,28.854 cw(c-30.714,28.575) -30.32,28.575 ; U6.1@-30.436,28.854 cw(c-30.714,28.575) -30.32,28.575 ; -30.32,28.61 cw(c-29.976,28.61) U6.1@-30.219,28.854 ; -30.32,28.61 cw(c-29.976,28.61) U6.1@-30.219,28.854 ; -30.32,28.61 cw(c-29.976,28.61) U6.1@-30.219,28.854 ; -30.32,28.61 cw(c-29.976,28.61) U6.1@-30.219,28.854 ; -30.32,28.61 cw(c-29.976,28.61) U6.1@-30.219,28.854
NetR26_1: R26.1 U6.2 | length 12.4
  Top Layer w0.254: U6.2@-29.328,29.61 -29.328,27.994 -29,27.666 -29,26.658 R26.1@-28.974,26.633 ; U6.2@-29.436,28.854 cw(c-29.697,28.593) -29.328,28.593 ; U6.2@-29.436,28.854 cw(c-29.697,28.593) -29.328,28.593 ; U6.2@-29.436,28.854 cw(c-29.697,28.593) -29.328,28.593 ; U6.2@-29.436,28.854 cw(c-29.697,28.593) -29.328,28.593 ; U6.2@-29.436,28.854 cw(c-29.697,28.593) -29.328,28.593 ; -29.328,28.593 cw(c-28.958,28.593) U6.2@-29.219,28.854 ; -29.328,28.593 cw(c-28.958,28.593) U6.2@-29.219,28.854 ; -29.328,28.593 cw(c-28.958,28.593) U6.2@-29.219,28.854 ; -29.328,28.593 cw(c-28.958,28.593) U6.2@-29.219,28.854 ; -29.328,28.593 cw(c-28.958,28.593) U6.2@-29.219,28.854 ; R26.1@-29.238,26.872 ccw(c-29.814,27.448) -29,27.448 ; R26.1@-29.238,26.872 ccw(c-29.814,27.448) -29,27.448 ; R26.1@-29.238,26.872 ccw(c-29.814,27.448) -29,27.448 ; R26.1@-29.238,26.872 ccw(c-29.814,27.448) -29,27.448 ; R26.1@-29.238,26.872 ccw(c-29.814,27.448) -29,27.448 ; -29,27.45 ccw(c-28.182,27.45) R26.1@-28.76,26.872 ; -29,27.45 ccw(c-28.182,27.45) R26.1@-28.76,26.872 ; -29,27.45 ccw(c-28.182,27.45) R26.1@-28.76,26.872 ; -29,27.45 ccw(c-28.182,27.45) R26.1@-28.76,26.872 ; -29,27.45 ccw(c-28.182,27.45) R26.1@-28.76,26.872
NetR27_1: R27.1 U6.3 | length 12.6
  Top Layer w0.254: U6.3@-28.328,29.61 -28.328,28.391 -27.45,27.514 R27.1@-27.45,26.658 ; U6.3@-28.436,28.854 cw(c-28.697,28.593) -28.328,28.593 ; U6.3@-28.436,28.854 cw(c-28.697,28.593) -28.328,28.593 ; U6.3@-28.436,28.854 cw(c-28.697,28.593) -28.328,28.593 ; U6.3@-28.436,28.854 cw(c-28.697,28.593) -28.328,28.593 ; U6.3@-28.436,28.854 cw(c-28.697,28.593) -28.328,28.593 ; -28.328,28.593 cw(c-27.958,28.593) U6.3@-28.219,28.854 ; -28.328,28.593 cw(c-27.958,28.593) U6.3@-28.219,28.854 ; -28.328,28.593 cw(c-27.958,28.593) U6.3@-28.219,28.854 ; -28.328,28.593 cw(c-27.958,28.593) U6.3@-28.219,28.854 ; -28.328,28.593 cw(c-27.958,28.593) U6.3@-28.219,28.854 ; R27.1@-27.689,26.897 ccw(c-28.266,27.474) -27.45,27.474 ; R27.1@-27.689,26.897 ccw(c-28.266,27.474) -27.45,27.474 ; R27.1@-27.689,26.897 ccw(c-28.266,27.474) -27.45,27.474 ; R27.1@-27.689,26.897 ccw(c-28.266,27.474) -27.45,27.474 ; R27.1@-27.689,26.897 ccw(c-28.266,27.474) -27.45,27.474 ; -27.45,27.474 ccw(c-26.634,27.474) R27.1@-27.211,26.897 ; -27.45,27.474 ccw(c-26.634,27.474) R27.1@-27.211,26.897 ; -27.45,27.474 ccw(c-26.634,27.474) R27.1@-27.211,26.897 ; -27.45,27.474 ccw(c-26.634,27.474) R27.1@-27.211,26.897 ; -27.45,27.474 ccw(c-26.634,27.474) R27.1@-27.211,26.897
NetR28_1: R28.1 U6.4 | length 15.3
  Top Layer w0.203: R28.1@-26.03,26.677 R28.1@-26.03,26.78
  Top Layer w0.254: U6.4@-27.328,29.61 -27.328,28.433 -25.774,26.879 R28.1@-25.774,26.658 ; U6.4@-27.436,28.854 cw(c-27.697,28.593) -27.328,28.593 ; U6.4@-27.436,28.854 cw(c-27.697,28.593) -27.328,28.593 ; U6.4@-27.436,28.854 cw(c-27.697,28.593) -27.328,28.593 ; U6.4@-27.436,28.854 cw(c-27.697,28.593) -27.328,28.593 ; U6.4@-27.436,28.854 cw(c-27.697,28.593) -27.328,28.593 ; -27.328,28.593 cw(c-26.958,28.593) U6.4@-27.219,28.854 ; -27.328,28.593 cw(c-26.958,28.593) U6.4@-27.219,28.854 ; -27.328,28.593 cw(c-26.958,28.593) U6.4@-27.219,28.854 ; -27.328,28.593 cw(c-26.958,28.593) U6.4@-27.219,28.854 ; -27.328,28.593 cw(c-26.958,28.593) U6.4@-27.219,28.854 ; -26.549,27.654 cw(c-27.546,26.658) R28.1@-26.137,26.658 ; -26.549,27.654 cw(c-27.546,26.658) R28.1@-26.137,26.658 ; -26.549,27.654 cw(c-27.546,26.658) R28.1@-26.137,26.658 ; -26.549,27.654 cw(c-27.546,26.658) R28.1@-26.137,26.658 ; -26.549,27.654 cw(c-27.546,26.658) R28.1@-26.137,26.658 ; -26.116,27.221 cw(c-26.679,26.658) R28.1@-25.883,26.658 ; -26.116,27.221 cw(c-26.679,26.658) R28.1@-25.883,26.658 ; -26.116,27.221 cw(c-26.679,26.658) R28.1@-25.883,26.658 ; -26.116,27.221 cw(c-26.679,26.658) R28.1@-25.883,26.658 ; -26.116,27.221 cw(c-26.679,26.658) R28.1@-25.883,26.658
NTC_CON: R9.2 U3.31 | length 41.3
  Top Layer w0.203: v1(-48.761,23.958) -48.075,23.958 -46.78,22.662 -41.369,22.662 -40.221,21.514 U3.31@-39.903,21.514 ; v1@-48.585,23.782 cw(c-48.161,23.358) -48.161,23.958 ; v1@-48.585,23.782 cw(c-48.161,23.358) -48.161,23.958 ; v1@-48.585,23.782 cw(c-48.161,23.358) -48.161,23.958 ; v1@-48.585,23.782 cw(c-48.161,23.358) -48.161,23.958 ; v1@-48.585,23.782 cw(c-48.161,23.358) -48.161,23.958 ; v1@-48.585,24.133 ccw(c-48.161,24.557) -48.161,23.958 ; v1@-48.585,24.133 ccw(c-48.161,24.557) -48.161,23.958 ; v1@-48.585,24.133 ccw(c-48.161,24.557) -48.161,23.958 ; v1@-48.585,24.133 ccw(c-48.161,24.557) -48.161,23.958 ; v1@-48.585,24.133 ccw(c-48.161,24.557) -48.161,23.958
  Bottom Layer w0.203: R9.2@-50.302,36.251 -49.98,36.251 -49.624,35.896 -49.624,35.21 -48.532,34.118 ; -48.812,34.397 -48.532,34.118 ; v1(-48.761,23.958) -48.964,24.161 -48.964,25.253 -47.796,26.422 -47.007,26.422 -45.703,27.725 -45.703,30 -47.745,32.041 -47.745,33.33 -48.532,34.118 ; R9.2@-50.248,36.076 cw(c-50.063,35.563) -49.677,35.948 ; R9.2@-50.248,36.076 cw(c-50.063,35.563) -49.677,35.948 ; R9.2@-50.248,36.076 cw(c-50.063,35.563) -49.677,35.948 ; -48.964,24.557 ccw(c-48.161,24.557) v1@-48.729,23.99 ; -48.964,24.557 ccw(c-48.161,24.557) v1@-48.729,23.99 ; -48.964,24.557 ccw(c-48.161,24.557) v1@-48.729,23.99 ; -48.964,24.557 ccw(c-48.161,24.557) v1@-48.729,23.99 ; -48.964,24.557 ccw(c-48.161,24.557) v1@-48.729,23.99 ; -48.964,25.048 ccw(c-47.671,25.048) v1@-48.585,24.133 ; -48.964,25.048 ccw(c-47.671,25.048) v1@-48.585,24.133 ; -48.964,25.048 ccw(c-47.671,25.048) v1@-48.585,24.133 ; -48.964,25.048 ccw(c-47.671,25.048) v1@-48.585,24.133 ; -48.964,25.048 ccw(c-47.671,25.048) v1@-48.585,24.133
RX_DEBUG: P2.3 RX_D.1 U3.38 | length 30.5
  Top Layer w0.203: P2.3@-45.904,15.855 -45.904,16.172 -44.494,17.582 -42.233,17.582 -41.102,18.714 U3.38@-39.903,18.714 ; P2.3@-45.904,16.454 ccw(c-45.904,17.133) -45.423,16.653 ; P2.3@-45.904,16.454 ccw(c-45.904,17.133) -45.423,16.653 ; P2.3@-45.904,16.454 ccw(c-45.904,17.133) -45.423,16.653 ; P2.3@-45.904,16.454 ccw(c-45.904,17.133) -45.423,16.653 ; P2.3@-45.904,16.454 ccw(c-45.904,17.133) -45.423,16.653 ; P2.3@-45.709,16.055 cw(c-44.955,16.055) -45.488,16.588 ; P2.3@-45.709,16.055 cw(c-44.955,16.055) -45.488,16.588 ; P2.3@-45.709,16.055 cw(c-44.955,16.055) -45.488,16.588 ; P2.3@-45.709,16.055 cw(c-44.955,16.055) -45.488,16.588 ; P2.3@-45.709,16.055 cw(c-44.955,16.055) -45.488,16.588 ; P2.3@-45.505,16.055 cw(c-44.261,16.055) -45.141,16.935 ; P2.3@-45.505,16.055 cw(c-44.261,16.055) -45.141,16.935 ; P2.3@-45.505,16.055 cw(c-44.261,16.055) -45.141,16.935 ; P2.3@-45.505,16.055 cw(c-44.261,16.055) -45.141,16.935 ; P2.3@-45.505,16.055 cw(c-44.261,16.055) -45.141,16.935 ; P2.3@-45.891,16.358 ccw(c-45.891,16.773) -45.597,16.479 cw(c-45.891,16.773) P2.3@-45.891,16.358 ; P2.3@-45.642,16.109 cw(c-44.859,16.109) -45.413,16.663 ccw(c-44.859,16.109) P2.3@-45.642,16.109
  Bottom Layer w0.203: RX_D.1@-45.916,14.56 -45.891,14.585 v1(-45.891,16.109) ; RX_D.1@-45.891,15.509 ccw(c-46.49,15.509) -46.066,15.934 cw(c-46.49,15.509) RX_D.1@-45.891,15.509 ; RX_D.1@-45.891,15.509 cw(c-45.291,15.509) -45.715,15.934 ccw(c-45.291,15.509) RX_D.1@-45.891,15.509 ; v1(-45.891,16.109) ccw(c-44.75,16.109) -45.436,15.198 cw(c-44.75,16.109) v1(-45.891,16.109) ; v1(-45.891,16.109) cw(c-46.961,16.109) -46.362,15.222 ccw(c-46.961,16.109) v1(-45.891,16.109) ; RX_D.1@-46.249,15.053 ccw(c-46.703,15.727) -45.891,15.727 cw(c-46.703,15.727) RX_D.1@-46.249,15.053 ; -45.891,15.702 ccw(c-45.056,15.702) -45.558,15.035 cw(c-45.056,15.702) -45.891,15.702
RX_LEIDA: LeiDa.4 R31.1 RX_L.1 U3.2 | length 88.1
  Top Layer w0.203: v1(-39.49,14.042) -39.49,15.296 -38.803,15.983 U3.2@-38.803,17.214 ; v1@-23.767,36.074 -22.417,37.424 LeiDa.4@-22.417,38.562 LeiDa.4@-22.417,38.664 ; v1@-39.665,14.218 ccw(c-40.09,14.642) -39.49,14.642 ; v1@-39.665,14.218 ccw(c-40.09,14.642) -39.49,14.642 ; v1@-39.665,14.218 ccw(c-40.09,14.642) -39.49,14.642 ; v1@-39.665,14.218 ccw(c-40.09,14.642) -39.49,14.642 ; -39.49,14.642 ccw(c-38.89,14.642) v1@-39.314,14.218 ; -39.49,14.642 ccw(c-38.89,14.642) v1@-39.314,14.218 ; -39.49,14.642 ccw(c-38.89,14.642) v1@-39.314,14.218 ; -39.49,14.642 ccw(c-38.89,14.642) v1@-39.314,14.218 ; v1@-23.793,36.322 ccw(c-23.793,36.983) -23.325,36.516 ; v1@-23.793,36.322 ccw(c-23.793,36.983) -23.325,36.516 ; v1@-23.793,36.322 ccw(c-23.793,36.983) -23.325,36.516 ; v1@-23.544,36.074 cw(c-23.006,36.074) -23.387,36.454 ; v1@-23.544,36.074 cw(c-23.006,36.074) -23.387,36.454 ; v1@-23.544,36.074 cw(c-23.006,36.074) -23.387,36.454 ; LeiDa.4@-22.557,38.024 cw(c-22.896,37.685) -22.417,37.685 ; LeiDa.4@-22.557,38.024 cw(c-22.896,37.685) -22.417,37.685 ; LeiDa.4@-22.557,38.024 cw(c-22.896,37.685) -22.417,37.685 ; -22.417,37.583 ccw(c-22.896,37.583) -22.557,37.922 cw(c-22.896,37.583) -22.417,37.583 ; -22.417,37.583 cw(c-21.938,37.583) -22.277,37.922 ccw(c-21.938,37.583) -22.417,37.583 ; -22.417,37.685 cw(c-21.938,37.685) LeiDa.4@-22.277,38.024 ; -22.417,37.685 cw(c-21.938,37.685) LeiDa.4@-22.277,38.024 ; -22.417,37.685 cw(c-21.938,37.685) LeiDa.4@-22.277,38.024
  Bottom Layer w0.203: v1@-39.372,13.925 -38.394,13.925 -38.013,13.544 -35.235,13.544 -35.006,13.315 -27.12,13.315 -23.081,17.354 -23.081,17.403 -21.403,19.081 -18.218,19.081 -13.689,23.61 -13.689,27.919 -14.452,28.682 -16.281,28.682 -22.111,34.511 -22.111,36.429 ; R31.1@-27.628,31.56 -27.628,32.695 -27.425,32.899 -27.374,32.899 -26.968,32.899 v1(-23.793,36.074) -23.163,36.703 -22.384,36.703 -22.111,36.429 ; RX_L.1@-19.957,35.439 -20.948,36.429 -22.111,36.429 ; R31.1@-27.885,31.817 ccw(c-28.505,32.438) -27.628,32.438 ; R31.1@-27.885,31.817 ccw(c-28.505,32.438) -27.628,32.438 ; R31.1@-27.885,31.817 ccw(c-28.505,32.438) -27.628,32.438 ; R31.1@-27.885,31.817 ccw(c-28.505,32.438) -27.628,32.438 ; R31.1@-27.885,31.817 ccw(c-28.505,32.438) -27.628,32.438 ; -27.628,32.438 ccw(c-26.751,32.438) R31.1@-27.371,31.817 ; -27.628,32.438 ccw(c-26.751,32.438) R31.1@-27.371,31.817 ; -27.628,32.438 ccw(c-26.751,32.438) R31.1@-27.371,31.817 ; -27.628,32.438 ccw(c-26.751,32.438) R31.1@-27.371,31.817 ; -27.628,32.438 ccw(c-26.751,32.438) R31.1@-27.371,31.817 ; -24.217,35.65 cw(c-23.793,35.225) v1@-23.793,35.825 ; -24.217,35.65 ccw(c-24.641,36.074) v1@-24.041,36.074 ; -24.217,35.65 ccw(c-24.641,36.074) v1@-24.041,36.074 ; -24.217,35.65 cw(c-23.793,35.225) v1@-23.793,35.825 ; -24.217,35.65 ccw(c-24.641,36.074) v1@-24.041,36.074 ; -24.217,35.65 cw(c-23.793,35.225) v1@-23.793,35.825 ; v1@-23.793,36.322 ccw(c-23.793,36.922) -23.369,36.498 ; v1@-23.793,36.322 ccw(c-23.793,36.922) -23.369,36.498 ; v1@-23.793,36.322 ccw(c-23.793,36.922) -23.369,36.498 ; v1@-23.544,36.074 cw(c-22.945,36.074) -23.369,36.498 ; v1@-23.544,36.074 cw(c-22.945,36.074) -23.369,36.498 ; v1@-23.544,36.074 cw(c-22.945,36.074) -23.369,36.498
SET_CHARG_I: Q7.1 U3.40 | length 41.3
  Top Layer w0.203: v1(-41.42,15.144) -41.42,17.074 -40.581,17.914 U3.40@-39.903,17.914 ; Q7.1@-23.343,14.075 -22.19,14.075 v1(-22.167,14.052) ; v1@-41.596,15.32 ccw(c-42.02,15.744) -41.42,15.744 ; v1@-41.596,15.32 ccw(c-42.02,15.744) -41.42,15.744 ; v1@-41.596,15.32 ccw(c-42.02,15.744) -41.42,15.744 ; -41.42,15.744 ccw(c-40.821,15.744) v1@-41.245,15.32 ; -41.42,15.744 ccw(c-40.821,15.744) v1@-41.245,15.32 ; -41.42,15.744 ccw(c-40.821,15.744) v1@-41.245,15.32 ; Q7.1@-22.968,13.935 cw(c-22.629,13.596) -22.629,14.075 ; Q7.1@-22.968,13.935 cw(c-22.629,13.596) -22.629,14.075 ; Q7.1@-22.968,13.935 cw(c-22.629,13.596) -22.629,14.075 ; Q7.1@-22.968,14.215 ccw(c-22.629,14.554) -22.629,14.075 ; Q7.1@-22.968,14.215 ccw(c-22.629,14.554) -22.629,14.075 ; Q7.1@-22.968,14.215 ccw(c-22.629,14.554) -22.629,14.075 ; Q7.1@-22.823,14.075 cw(c-22.823,13.396) v1@-22.343,13.876 ; Q7.1@-22.823,14.075 cw(c-22.823,13.396) v1@-22.343,13.876 ; Q7.1@-22.823,14.075 cw(c-22.823,13.396) v1@-22.343,13.876 ; -22.71,14.075 ccw(c-22.71,14.595) v1@-22.343,14.227 ; -22.71,14.075 ccw(c-22.71,14.595) v1@-22.343,14.227 ; -22.71,14.075 ccw(c-22.71,14.595) v1@-22.343,14.227
  Bottom Layer w0.254: v1(-41.42,15.144) -41.42,13.442 -38.8,10.822 -36.76,10.822 -36.512,11.071 -25.148,11.071 v1(-22.167,14.052) ; v1@-41.578,14.986 cw(c-41.959,14.606) -41.42,14.606 ; v1@-41.578,14.986 cw(c-41.959,14.606) -41.42,14.606 ; v1@-41.578,14.986 cw(c-41.959,14.606) -41.42,14.606 ; -41.42,14.606 cw(c-40.882,14.606) v1@-41.263,14.986 ; -41.42,14.606 cw(c-40.882,14.606) v1@-41.263,14.986 ; -41.42,14.606 cw(c-40.882,14.606) v1@-41.263,14.986 ; -22.548,13.671 cw(c-22.167,13.29) v1@-22.167,13.829 ; -22.548,13.671 ccw(c-22.928,14.052) v1@-22.39,14.052 ; -22.548,13.671 ccw(c-22.928,14.052) v1@-22.39,14.052 ; -22.548,13.671 cw(c-22.167,13.29) v1@-22.167,13.829 ; -22.548,13.671 ccw(c-22.928,14.052) v1@-22.39,14.052 ; -22.548,13.671 cw(c-22.167,13.29) v1@-22.167,13.829
SWS: P1.3 U3.7 | length 47.4
  Top Layer w0.203: P1.3@-49.929,9.505 -49.853,9.581 -43.452,9.581 -43.224,9.81 -39.185,9.81 -38.702,10.293 -37.01,10.293 -35.924,11.379 -35.924,14.875 -36.803,15.754 U3.7@-36.803,17.214 ; P1.3@-49.723,9.299 cw(c-49.04,8.616) -49.04,9.581 ; P1.3@-49.723,9.299 cw(c-49.04,8.616) -49.04,9.581 ; P1.3@-49.723,9.299 cw(c-49.04,8.616) -49.04,9.581 ; P1.3@-49.723,9.299 cw(c-49.04,8.616) -49.04,9.581 ; P1.3@-49.723,9.299 cw(c-49.04,8.616) -49.04,9.581 ; P1.3@-49.579,9.155 cw(c-48.55,8.126) -48.55,9.581 ; P1.3@-49.579,9.155 cw(c-48.55,8.126) -48.55,9.581 ; P1.3@-49.579,9.155 cw(c-48.55,8.126) -48.55,9.581 ; P1.3@-49.579,9.155 cw(c-48.55,8.126) -48.55,9.581 ; P1.3@-49.579,9.155 cw(c-48.55,8.126) -48.55,9.581 ; P1.3@-49.579,9.855 ccw(c-48.918,10.517) -48.918,9.581 ; P1.3@-49.579,9.855 ccw(c-48.918,10.517) -48.918,9.581 ; P1.3@-49.579,9.855 ccw(c-48.918,10.517) -48.918,9.581 ; P1.3@-49.579,9.855 ccw(c-48.918,10.517) -48.918,9.581 ; P1.3@-49.579,9.855 ccw(c-48.918,10.517) -48.918,9.581 ; P1.3@-49.435,9.011 cw(c-48.059,7.635) -48.059,9.581 ; P1.3@-49.435,9.011 cw(c-48.059,7.635) -48.059,9.581 ; P1.3@-49.435,9.011 cw(c-48.059,7.635) -48.059,9.581 ; P1.3@-49.435,9.011 cw(c-48.059,7.635) -48.059,9.581 ; P1.3@-49.435,9.011 cw(c-48.059,7.635) -48.059,9.581 ; P1.3@-49.435,9.999 ccw(c-48.427,11.007) -48.427,9.581 ; P1.3@-49.435,9.999 ccw(c-48.427,11.007) -48.427,9.581 ; P1.3@-49.435,9.999 ccw(c-48.427,11.007) -48.427,9.581 ; P1.3@-49.435,9.999 ccw(c-48.427,11.007) -48.427,9.581 ; P1.3@-49.435,9.999 ccw(c-48.427,11.007) -48.427,9.581
TX_DEBUG: P2.4 TX_D.1 U3.39 | length 9.9
  Top Layer w0.203: v1(-43.904,15.855) -43.3,15.855 ; U3.39@-39.903,18.314 -40.841,18.314 -43.3,15.855 ; P2.4@-43.538,15.698 cw(c-43.3,15.597) -43.3,15.855 ; P2.4@-43.538,15.698 cw(c-43.3,15.597) -43.3,15.855 ; P2.4@-43.538,15.698 cw(c-43.3,15.597) -43.3,15.855 ; P2.4@-43.538,15.698 cw(c-43.3,15.597) -43.3,15.855 ; P2.4@-43.538,15.698 cw(c-43.3,15.597) -43.3,15.855 ; P2.4@-43.538,16.012 ccw(c-43.3,16.114) -43.3,15.855 ; P2.4@-43.538,16.012 ccw(c-43.3,16.114) -43.3,15.855 ; P2.4@-43.538,16.012 ccw(c-43.3,16.114) -43.3,15.855 ; P2.4@-43.538,16.012 ccw(c-43.3,16.114) -43.3,15.855 ; P2.4@-43.538,16.012 ccw(c-43.3,16.114) -43.3,15.855 ; -43.304,15.855 ccw(c-43.304,15.255) -43.728,15.68 cw(c-43.304,15.255) -43.304,15.855 ; -43.304,15.855 cw(c-43.304,16.455) -43.728,16.031 ccw(c-43.304,16.455) -43.304,15.855
TX_LEIDA: LeiDa.3 R30.1 TX_L.1 U3.1 | length 93.2
  Top Layer w0.203: v1(-40.252,14.906) -40.252,15.449 ; U3.1@-39.203,17.214 -39.203,16.497 -40.252,15.449 ; v1(-22.853,36.074) -22.294,36.074 ; LeiDa.3@-21.167,38.664 -21.167,37.201 -22.294,36.074 ; v1@-40.414,15.094 ccw(c-40.721,15.449) -40.252,15.449 ; v1@-40.414,15.094 ccw(c-40.721,15.449) -40.252,15.449 ; v1@-40.414,15.094 ccw(c-40.721,15.449) -40.252,15.449 ; v1@-40.414,15.094 ccw(c-40.721,15.449) -40.252,15.449 ; -40.252,15.449 ccw(c-39.783,15.449) v1@-40.089,15.094 ; -40.252,15.449 ccw(c-39.783,15.449) v1@-40.089,15.094 ; -40.252,15.449 ccw(c-39.783,15.449) v1@-40.089,15.094 ; -40.252,15.449 ccw(c-39.783,15.449) v1@-40.089,15.094 ; v1@-22.668,35.907 cw(c-22.294,35.569) -22.294,36.074 ; v1@-22.668,35.907 cw(c-22.294,35.569) -22.294,36.074 ; v1@-22.668,35.907 cw(c-22.294,35.569) -22.294,36.074 ; v1@-22.668,35.907 cw(c-22.294,35.569) -22.294,36.074 ; v1@-22.668,35.907 cw(c-22.294,35.569) -22.294,36.074 ; v1@-22.668,36.24 ccw(c-22.294,36.578) -22.294,36.074 ; v1@-22.668,36.24 ccw(c-22.294,36.578) -22.294,36.074 ; v1@-22.668,36.24 ccw(c-22.294,36.578) -22.294,36.074 ; v1@-22.668,36.24 ccw(c-22.294,36.578) -22.294,36.074 ; v1@-22.668,36.24 ccw(c-22.294,36.578) -22.294,36.074 ; LeiDa.3@-21.307,38.024 cw(c-21.646,37.685) -21.167,37.685 ; LeiDa.3@-21.307,38.024 cw(c-21.646,37.685) -21.167,37.685 ; LeiDa.3@-21.307,38.024 cw(c-21.646,37.685) -21.167,37.685 ; -21.167,37.583 ccw(c-21.646,37.583) -21.307,37.922 cw(c-21.646,37.583) -21.167,37.583 ; -21.167,37.583 cw(c-20.688,37.583) -21.026,37.922 ccw(c-20.688,37.583) -21.167,37.583 ; -21.167,37.685 cw(c-20.688,37.685) LeiDa.3@-21.026,38.024 ; -21.167,37.685 cw(c-20.688,37.685) LeiDa.3@-21.026,38.024 ; -21.167,37.685 cw(c-20.688,37.685) LeiDa.3@-21.026,38.024
  Bottom Layer w0.203: v1(-40.252,14.906) -39.496,14.906 -39.262,14.672 -39.229,14.672 -38.863,14.306 -38.236,14.306 -37.855,13.925 -35.077,13.925 -34.848,13.696 -27.577,13.696 -25.166,16.107 ; R30.1@-25.85,31.56 -25.85,33.16 -24.101,34.909 ; -25.367,15.906 -25.166,16.107 ; -23.887,35.123 -24.101,34.909 ; TX_L.1@-22.573,32.34 -22.486,32.34 -21.536,33.29 ; v1@-40.076,14.73 cw(c-39.652,14.306) -39.652,14.906 ; v1@-40.076,14.73 cw(c-39.652,14.306) -39.652,14.906 ; v1@-40.076,14.73 cw(c-39.652,14.306) -39.652,14.906 ; v1@-40.076,14.73 cw(c-39.652,14.306) -39.652,14.906 ; v1@-40.076,15.082 ccw(c-39.652,15.506) -39.652,14.906 ; v1@-40.076,15.082 ccw(c-39.652,15.506) -39.652,14.906 ; v1@-40.076,15.082 ccw(c-39.652,15.506) -39.652,14.906 ; v1@-40.076,15.082 ccw(c-39.652,15.506) -39.652,14.906 ; R30.1@-26.107,31.817 ccw(c-26.727,32.438) -25.85,32.438 ; R30.1@-26.107,31.817 ccw(c-26.727,32.438) -25.85,32.438 ; R30.1@-26.107,31.817 ccw(c-26.727,32.438) -25.85,32.438 ; R30.1@-26.107,31.817 ccw(c-26.727,32.438) -25.85,32.438 ; R30.1@-26.107,31.817 ccw(c-26.727,32.438) -25.85,32.438 ; -25.85,32.438 ccw(c-24.973,32.438) R30.1@-25.593,31.817 ; -25.85,32.438 ccw(c-24.973,32.438) R30.1@-25.593,31.817 ; -25.85,32.438 ccw(c-24.973,32.438) R30.1@-25.593,31.817 ; -25.85,32.438 ccw(c-24.973,32.438) R30.1@-25.593,31.817 ; -25.85,32.438 ccw(c-24.973,32.438) R30.1@-25.593,31.817 ; -25.166,16.107 -21.811,19.462 -18.484,19.462 -14.146,23.8 -14.146,27.73 -14.61,28.194 -16.44,28.194 -21.536,33.29 ; -24.101,34.909 -24.018,34.909 v1(-22.853,36.074) -22.853,34.607 -21.536,33.29 ; -23.277,35.65 cw(c-22.853,35.225) v1@-22.853,35.825 ; -23.277,35.65 ccw(c-23.701,36.074) v1@-23.101,36.074 ; -23.277,35.65 cw(c-22.853,35.225) v1@-22.853,35.825 ; -23.277,35.65 ccw(c-23.701,36.074) v1@-23.101,36.074 ; -23.277,35.65 ccw(c-23.701,36.074) v1@-23.101,36.074 ; -23.277,35.65 cw(c-22.853,35.225) v1@-22.853,35.825 ; -23.277,35.65 ccw(c-23.701,36.074) v1@-23.101,36.074 ; -23.277,35.65 cw(c-22.853,35.225) v1@-22.853,35.825 ; -23.277,35.65 ccw(c-23.701,36.074) v1@-23.101,36.074 ; -23.277,35.65 cw(c-22.853,35.225) v1@-22.853,35.825 ; v1@-23.028,35.898 cw(c-23.453,35.474) -22.853,35.474 ; v1@-23.028,35.898 cw(c-23.453,35.474) -22.853,35.474 ; v1@-23.028,35.898 cw(c-23.453,35.474) -22.853,35.474 ; v1@-23.028,35.898 cw(c-23.453,35.474) -22.853,35.474 ; v1@-23.028,35.898 cw(c-23.453,35.474) -22.853,35.474 ; -22.853,35.474 cw(c-22.253,35.474) v1@-22.677,35.898 ; -22.853,35.474 cw(c-22.253,35.474) v1@-22.677,35.898 ; -22.853,35.474 cw(c-22.253,35.474) v1@-22.677,35.898 ; -22.853,35.474 cw(c-22.253,35.474) v1@-22.677,35.898 ; -22.853,35.474 cw(c-22.253,35.474) v1@-22.677,35.898